# EAGLE board Gas_Temperature_Sensor (EAGLE 9.7.0)

Size 199.13 x 113.75 mm. Coordinates in mm from the lower left corner, seen from the top.
Outline: 0,0 199.13,0 199.13,113.75 0,113.75 0,0
Copper layers (1*16): Top 0.035mm / dielectric 1.5mm / Bottom 0.035mm
Design rules "default": minimum track width 6mil, minimum drill 0.35mm, track to track 6mil, track to pad 6mil, pad to pad 6mil, via to via 6mil, smd to smd 6mil, copper to edge 40mil, drill to drill 6mil, minimum pad ring 10mil, minimum via ring 8mil, stop-mask expansion 4mil, vias tented up to drill 0mil, thermal gap 10mil

## Footprints (pad centres in the part's own frame; a part is rotated, then mirrored left to right if it is on the bottom)
LEDRD254W60D565H860B = drill 0.981 pad 1.581: 1 -1.27,0; 2 1.27,0
LEDRD254W60D565H860B_G = drill 0.981 pad 1.581: 1 -1.27,0; 2 1.27,0
MQ-XX-SOCKET = drill 1.27: 1 -6.223,6.223; 2 -8.788,0; 3 -6.223,-6.223; 4 6.223,-6.223; 5 8.788,0; 6 6.223,6.223
RESAD1016W63L850D250B = drill 0.83 pad 1.43: 1 -5.08,0; 2 5.08,0
HA-06-SM065 = drill 1 pad 1.676: 1 -2.54,-2.54; 2 0,2.54; 3 2.54,-2.54
ARDUINO-UNO-R3-SHIELD = drill 1.016 pad 1.88: 3.3V 24.13,-2.54; 5V 24.13,0; A0 24.13,12.7; A1 24.13,15.24; A2 24.13,17.78; A3 24.13,20.32; A4 24.13,22.86; A5 24.13,25.4; AREF -24.13,-13.97; D2 -24.13,20.32; D3 -24.13,17.78; D4 -24.13,15.24; D5 -24.13,12.7; D6 -24.13,10.16; D7 -24.13,7.62; D8 -24.13,3.81; D9 -24.13,1.27; D10 -24.13,-1.27; D11 -24.13,-3.81; D12 -24.13,-6.35; D13 -24.13,-8.89; GND@0 24.13,2.54; GND@1 24.13,5.08; GND@2 -24.13,-11.43; IOREF 24.13,-7.62; NC 24.13,-10.16; RES 24.13,-5.08; RX -24.13,25.4; SCL -24.13,-19.05; SDA -24.13,-16.51; TX -24.13,22.86; VIN 24.13,7.62
TO92 = drill 0.813 octagon: 1 -1.27,0; 2 0,1.905; 3 1.27,0
LCD-I2C = drill 1.016 long: 1 -19.05,-5.08; 2 -19.05,-7.62; 3 -19.05,-10.16; 4 -19.05,-12.7

## Placement (x,y rotation side)
D1  RED  [LEDRD254W60D565H860B]  37.54,94.61 180 top
D2  GREEN  [LEDRD254W60D565H860B_G]  45.16,97.16 180 top
GAS2  GAS-SENSORMQ-XX-SOCKET  [MQ-XX-SOCKET]  61.67,88.27 270 top
R12  1k  [RESAD1016W63L850D250B]  56.59,104.78 90 top
RPOT1  250k  [HA-06-SM065]  81.99,71.75 0 top
U1  ARDUINO-UNO-R3-SHIELD  [ARDUINO-UNO-R3-SHIELD]  47.88,29.84 270 top
U4  TMP36GT9Z_TO92  [TO92]  23.57,94.61 0 top
ULCD_1  LCD-16X2-I2CSUNFOUNDER-IIC  [LCD-I2C]  143.5,41.02 0 top

## Library data of the parts
D1 = Tinkercad; CATEGORY: Opto-Electronic; SUB-CATEGORY: LED; VALUE: LED_RED
D2 = Tinkercad; CATEGORY: Opto-Electronic; SUB-CATEGORY: LED; VALUE: LED_GREEN
GAS2 R12 RPOT1 U1 U4 ULCD_1 = Tinkercad

## Nets
U1_5V: GAS2.4 GAS2.5 GAS2.6 RPOT1.3 U1.5V U4.3 ULCD_1.2
U1_A0: GAS2.1 GAS2.3 R12.1 U1.A0
U1_A1: U1.A1 U4.2
U1_D8: RPOT1.2 U1.D8
U1_D10: D2.1 U1.D10
U1_D13: D1.1 U1.D13
U1_GND: D1.2 D2.2 GAS2.2 R12.2 RPOT1.1 U1.GND@0 U1.GND@1 U1.GND@2 U4.1 ULCD_1.1
U1_SCL: U1.SCL ULCD_1.4
U1_SDA: U1.SDA ULCD_1.3

## Tracks (layer width: path | path; a pad name or v marks a point on that pad's centre or on a via)
U1_5V  (6 unrouted)
U1_A0  (3 unrouted)
U1_A1  (1 unrouted)
U1_D8  (1 unrouted)
U1_D10  (1 unrouted)
U1_D13  (1 unrouted)
U1_GND  (9 unrouted)
U1_SCL  (1 unrouted)
U1_SDA  (1 unrouted)